# Altium PCB pcbBoard.PcbDoc
Units mil, origin at the board's own origin, x right, y up, seen from the top; angles counter-clockwise.
Board outline 6000 x 4000 mil, 2 copper layers (Top Layer, Bottom Layer); 36 components, 33 nets, 186 pads, 0 vias.
Unrouted connection lines stored in the file: 111.
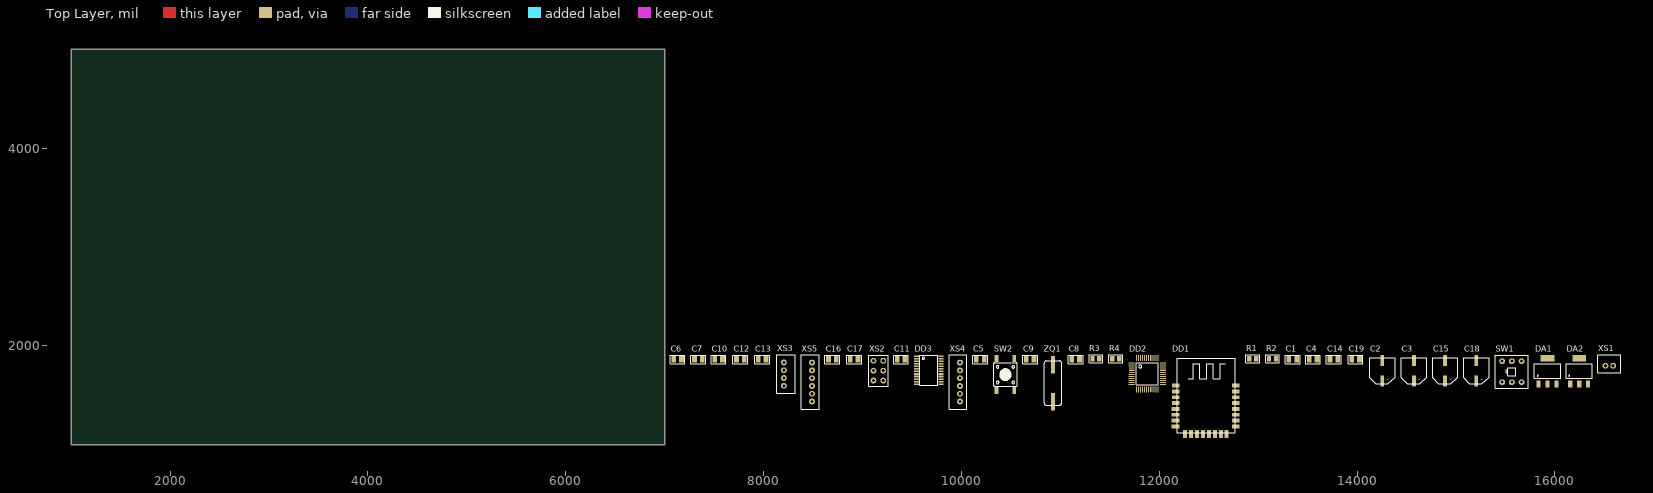
[diagram p0: Top Layer view]
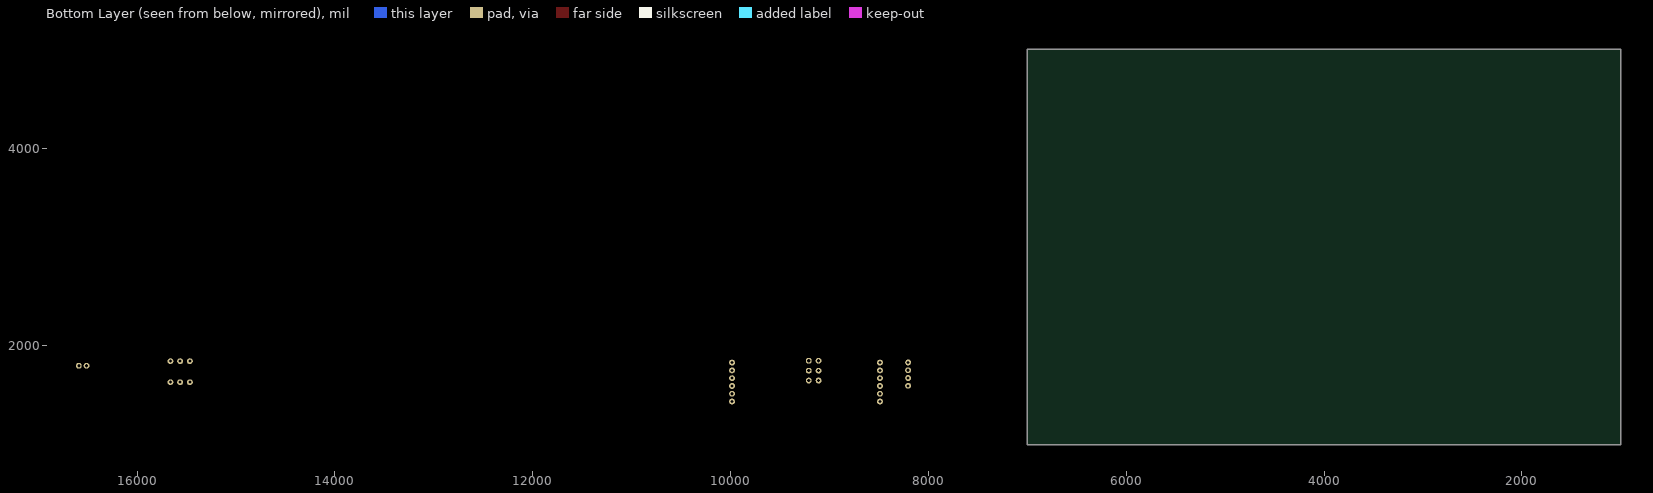
[diagram p1: Bottom Layer view, seen from below]

## Layer stack, top to bottom
Top Solder: solder mask 0.4, Solder Resist, Dk 3.5
Top Layer: signal copper 1.4
Dielectric 1: dielectric 12.6, FR-4, Dk 4.8
Bottom Layer: signal copper 1.4
Bottom Solder: solder mask 0.4, Solder Resist, Dk 3.5

## Board outline
1000,1000 7000,1000 7000,5000 1000,5000

## Design rules (kind name [scope] priority, off if disabled: settings)
Clearance [All] p1: gap=10 ignorepadtopadclearanceinfootprint=FALSE except(0: Arc-Hole Track-Hole SMDPad-Hole THPad-Hole Via-Hole Fill-Hole Poly-Hole Region-Hole Text-Hole)
PolygonConnect [All] p1: connectstyle=Relief reliefconductorwidth=10 reliefentries=4 polygonreliefangle="90 Angle" airgapwidth=10
RoomDefinition Schematic [InComponentClass('Schematic')] p1: confinementstyle=ConfineIn formatcopy=TRUE lockcomponents=FALSE outline 7045,1060 16680,1060 16680,2020 7045,2020
RoutingVias [All] p1: holewidth=28 width=50 viastyle="Through Hole" minholewidth=28 minwidth=50 maxholewidth=28 maxwidth=50
SolderMaskExpansion [All] p1: expansion=4
Width [All] p1: maxlimit=10 minlimit=10 preferedwidth=10
30 further rules are at their usual default settings.

## Components (designator, comment, footprint, x,y, rotation, side; value= is the part's Value field where it differs from the comment)
C1 "SMD0805" SMD_0805 13350,1865 r0 top value=0.1мкФ
C2 "SMD JCK ECAP" "SMD JCK" 14255,1750 r0 top value="220 мкФ"
C3 "SMD JCK ECAP" "SMD JCK" 14575,1750 r0 top value="220 мкФ"
C4 "SMD0805" SMD_0805 13555,1865 r0 top value=0.1мкФ
C5 "SMD0805" SMD_0805 10190,1865 r0 top value=0.1мкФ
C6 "SMD0805" SMD_0805 7130,1865 r0 top value=0.1мкФ
C7 "SMD0805" SMD_0805 7340,1865 r0 top value=0.1мкФ
C8 "SMD0805" SMD_0805 11155,1865 r0 top value=22пФ
C9 "SMD0805" SMD_0805 10695,1865 r0 top value=22пФ
C10 "SMD0805" SMD_0805 7545,1865 r0 top value=0.1мкФ
C11 "SMD0805" SMD_0805 9390,1865 r0 top value=0.1мкФ
C12 "SMD0805" SMD_0805 7765,1865 r0 top value=0.1мкФ
C13 "SMD0805" SMD_0805 7985,1865 r0 top value=1мкФ
C14 "SMD0805" SMD_0805 13765,1865 r0 top value=0.1мкФ
C15 "SMD JCK ECAP" "SMD JCK" 14890,1750 r0 top value="220 мкФ"
C16 "SMD0805" SMD_0805 8695,1865 r0 top value=0.1мкФ
C17 "SMD0805" SMD_0805 8915,1865 r0 top value=2.2мкФ
C18 "SMD JCK ECAP" "SMD JCK" 15205,1750 r0 top value="220 мкФ"
C19 "SMD0805" SMD_0805 13985,1865 r0 top value=0.1мкФ
DA1 "SOT223" SOT-223 15925,1745 r0 top
DA2 "SOT223" SOT-223 16245,1745 r0 top
DD1 "JDY-08" JDY-08 12470,1495 r0 top
DD2 "STM32F103C8T6" LQFP48_L 11880,1720 r0 top
DD3 "SSOP24" SSOP24 9670,1755 r0 top
R1 "4,7кОм" SMD0805 12945,1870 r0 top
R2 "1кОм" SMD0805 13145,1870 r0 top
R3 "4.7кОм" SMD0805 11360,1870 r0 top
R4 "4.7кОм" SMD0805 11560,1870 r0 top
SW1 "PS700L" KLS7-P 15565,1740 r0 top
SW2 "SWITCH" KLS76x6x4.3 10445,1710 r90 top
XS1 "" PH2.0-2P 16550,1800 r0 top
XS2 "PBD6" PBD2-3 9160,1750 r90 top
XS3 "PH2.0-4P" ph2.0-4P 8205,1715 r90 top
XS4 "1" PH2.0-6P 9985,1635 r90 top
XS5 "1" PH2.0-6P 8490,1635 r90 top
ZQ1 "HC-49SM" HC-49SM 10925,1625 r90 top

## Footprints (in the part's own frame and the unit in brackets; to place one, negate y for a bottom-side part, rotate by r counter-clockwise, add the part's x,y. Pads: shape width x height; smd on the part's side, far side on the other; paste and mask are expansions set on the pad)
HC-49SM [mm]
  rect 4.5x1.1 smd: 1(-4.75,0) 2(4.75,0)
  silkscreen extent -5.7,-2.25 5.7,2.25, body extent -6.2,-2.35 6.2,2.35, height 3.9
JDY-08 [mm]
  rect 2x1 smd: 1(-7.725,2.65) 2(-7.725,1.151) 3(-7.725,-0.351) 4(-7.725,-1.85) 5(-7.75,-3.35) 6(-7.75,-4.849) 7(-7.75,-6.351) 8(-7.75,-7.85) 17(7.7,-7.85) 18(7.7,-6.351) 19(7.7,-4.849) 20(7.7,-3.35) 21(7.725,-1.85) 22(7.725,-0.351) 23(7.725,1.151) 24(7.725,2.65)
  rect 1x2 smd: 9(-5.325,-9.75) 10(-3.75,-9.75) 11(-2.2,-9.75) 12(-0.675,-9.75) 13(0.825,-9.75) 14(2.35,-9.75) 15(3.875,-9.75) 16(5.375,-9.775)
  silkscreen extent -7.5,-9.4 7.51,9.7, body extent -7.39,-9.27 7.62,10.62, height 2.08
KLS7-P [mm]
  round 1.5 hole 0.8: 1(-2.5,2.7) 2(0,2.7) 3(2.5,2.7) 4(-2.5,-2.7) 5(0,-2.7) 6(2.5,-2.7)
  silkscreen extent -4.25,-4.25 4.25,4.25
KLS76x6x4.3 [mm]
  rect 1.8x1 smd: 1(-4.1,2.25) 1(4.1,2.25) 2(-4.1,-2.25) 2(4.1,-2.25)
  silkscreen extent -3,-3 3,3, body extent -4.5,-3 4.5,3, height 4.3
LQFP48_L [mm] "QFP, 48-Leads, Body 7x7mm, Pitch 0.5mm, IPC High Density"
  oval 1.55x0.25 smd: 1(-4.025,2.75) 2(-4.025,2.25) 3(-4.025,1.75) 4(-4.025,1.25) 5(-4.025,0.75) 6(-4.025,0.25) 7(-4.025,-0.25) 8(-4.025,-0.75) 9(-4.025,-1.25) 10(-4.025,-1.75) 11(-4.025,-2.25) 12(-4.025,-2.75) 25(4.025,-2.75) 26(4.025,-2.25) 27(4.025,-1.75) 28(4.025,-1.25) 29(4.025,-0.75) 30(4.025,-0.25) 31(4.025,0.25) 32(4.025,0.75) 33(4.025,1.25) 34(4.025,1.75) 35(4.025,2.25) 36(4.025,2.75)
  oval 0.25x1.55 smd: 13(-2.75,-4.025) 14(-2.25,-4.025) 15(-1.75,-4.025) 16(-1.25,-4.025) 17(-0.75,-4.025) 18(-0.25,-4.025) 19(0.25,-4.025) 20(0.75,-4.025) 21(1.25,-4.025) 22(1.75,-4.025) 23(2.25,-4.025) 24(2.75,-4.025) 37(2.75,4.025) 38(2.25,4.025) 39(1.75,4.025) 40(1.25,4.025) 41(0.75,4.025) 42(0.25,4.025) 43(-0.25,4.025) 44(-0.75,4.025) 45(-1.25,4.025) 46(-1.75,4.025) 47(-2.25,4.025) 48(-2.75,4.025)
  silkscreen extent -2.85,-2.85 2.85,2.85, body extent -4.49,-4.49 4.49,4.49, height 1.6
PBD2-3 [mm]
  round 1.5 hole 0.8: 1(-2.54,-1.27) 2(-2.54,1.27) 3(0,-1.27) 4(0,1.27) 5(2.54,-1.27) 6(2.54,1.27)
  silkscreen extent -4,-2.5 4,2.5, body extent -4.06,-2.54 4.06,2.54, height 8.5
PH2.0-2P [mm]
  round 1.5 hole 0.8: 1(-1,0) 2(1,0)
  silkscreen extent -2.95,-1.81 2.95,2.79, body extent -2.82,-1.74 3.08,2.76, height 6
ph2.0-4P [mm]
  round 1.5 hole 0.8: 1(-3,0) 2(-1,0) 3(1,0) 4(3,0)
  silkscreen extent -4.95,-2.92 4.95,1.78, body extent -4.95,-2.85 4.95,1.65, height 6
PH2.0-6P [mm]
  round 1.5 hole 0.8: 1(5,0) 2(3,0) 3(1,0) 4(-1,0) 5(-3,0) 6(-5,0)
  silkscreen extent -6.95,-1.81 6.95,2.79, body extent -6.95,-1.76 6.95,2.74, height 6
SMD0805 [mm]
  rect 1.1x1.4 smd: 1(0.875,0) 2(-0.875,0)
  silkscreen extent -1.78,-1.02 1.78,1.02, body extent -1,-0.6 1,0.6, height 0.7
"SMD JCK" [mm]
  rrect25% 1x2.8 smd: 1(0,-2.6) 2(0,2.6)
  silkscreen extent -3.22,-3.3 3.3,3.3, body extent -3.26,-3.93 3.34,3.66, height 5.9
SMD_0805 [mm]
  rect 1.2x1.6 smd: 1(-1,0) 2(1,0)
  silkscreen extent -1.9,-1.1 1.9,1.1, body extent -1,-0.62 1,0.63, height 1.01
SOT-223 [mm] "SOT-223/SC-73; 4 Leads; Body 6.7 x 7.3 mm, inc. leads (LxW max)"
  rect 1.1x1.75 smd: 1(-2.3,-3.3) 2(0,-3.3) 3(2.3,-3.3)
  rect 3.5x1.75 smd: 4(0,3.3)
  silkscreen extent -3.35,-1.85 3.35,1.85, body extent -3.35,-3.7 3.35,3.5, height 1.85
SSOP24 [mm] "TB6612FNG"
  rect 1.3x0.4 smd: 1(-3.1,3.575) 2(-3.1,2.925) 3(-3.1,2.275) 4(-3.1,1.625) 5(-3.1,0.975) 6(-3.1,0.325) 7(-3.1,-0.325) 8(-3.1,-0.975) 9(-3.1,-1.625) 10(-3.1,-2.275) 11(-3.1,-2.925) 12(-3.1,-3.575) 13(3.1,-3.575) 14(3.1,-2.925) 15(3.1,-2.275) 16(3.1,-1.625) 17(3.1,-0.975) 18(3.1,-0.325) 19(3.1,0.325) 20(3.1,0.975) 21(3.1,1.625) 22(3.1,2.275) 23(3.1,2.925) 24(3.1,3.575)
  silkscreen extent -2.3,-3.81 2.3,3.82, body extent -3.27,-3.95 3.28,3.95, height 1.2

## Part data
C1 C4 C5 C6 C7 C8 C9 C10 C11 C12 C13 C14 C16 C17 C19: "CAP"
DD2: I/Os (High Current)=37, Operating Frequency(F) (Processor speed) (MHz)=72, Supplier Part Number 1=497-6063-ND, Supply Voltage(Vcc) min (V)=2, A/D Converter="2x12-bit (10 Channel)", ComponentLink1Description="Manufacturer URL", ComponentLink1URL=http://www.st.com/web/en/home.html, ComponentLink2Description=Datasheet, ComponentLink2URL=http://www.st.com/st-web-ui/static/active/en/resource/technical/document/datasheet/CD00161566.pdf, ComponentLink3Description="Package Specification", ComponentLink3URL=http://www.st.com/st-web-ui/static/active/en/resource/technical/document/datasheet/DM00058181.pdf, Core="ARM Cortex-M3", DatasheetVersion="Rev. 16", FLASH Size (Prog) (kB)=64, Internal RAM Size (kB)=20, Mounting Technology="Surface Mount", PackageDescription="48-Pin Low Profile Quad Flat Package, 7 x 7 mm Body, 0.5 mm Pitch", PackageReference=LQFP48, PackageVersion="Rev. 6, 06/2013", Packing=Tray, PartNumber=STM32F103C8T6, Supplier 1=Digi-Key, Supplier 2=Farnell, Supplier 3=Newark, Supplier 4=Newark, Supplier 5=Mouser, Supplier Part Number 2=1447637, Supplier Part Number 3=59M2182, Supplier Part Number 4=57P1222, Supplier Part Number 5=511-STM32F103C8T6
R1 R2 R3 R4: library part SMD0805
SW1: library part KLS7, ComponentLink1Description=datasheet, ComponentLink1URL=https://static.chipdip.ru/lib/054/DOC000054735.pdf
XS1: library part PH2.0-2P
XS4: library part PH2.0-6P_1
XS5: library part PH2.0-6P_2
DA1 DA2: ComponentLink1Description=Datasheet, ComponentLink1URL=https://static.chipdip.ru/lib/029/DOC001029248.pdf
DD1: ComponentLink1Description=Datasheet, ComponentLink1URL=http://www.farnell.com/datasheets/2236920.pdf
SW2: ComponentLink1Description=AliExpress, ComponentLink1URL=https://ru.aliexpress.com/item/10PCS-4-4-1-6mm-4x4x1-6H-SMD-push-button-switch-microswitch-Tact-Switch/32731081870.html?spm=a2g0s.9042311.0.0.250233edGDnBBV

## Nets (pads, with @x,y where several pads share a name; then routed paths per layer and width w, separated by ;. In a path a pad name is that pad's centre, name@x,y a point inside that pad or via, vN(x,y) a via of type N, cw(c..) or ccw(c..) an arc to the next point about the centre after c; other vN are vias at no path point)
+3.3: C3.1 C4.2 C6.2 C7.2 C10.2 C11.2 C12.2 C13.2 DA1.2 DD1.1 DD2.1 DD2.9 DD2.24 DD2.36 DD2.48 DD3.19 DD3.20 R1.2 R3.2 XS2.1 XS4.5 XS5.5
+5: C18.1 C19.2 DA2.2 XS3.2
+7.2: C1.2 C2.1 C14.2 C15.1 C16.2 C17.2 DA1.3 DA2.3 DD3.13 DD3.14 DD3.24 SW1.3
GND: C1.1 C2.2 C3.2 C4.1 C5.1 C6.1 C7.1 C8.2 C9.2 C10.1 C11.1 C12.1 C13.1 C14.1 C15.2 C16.1 C17.1 C18.2 C19.1 DA1.1 DA2.1 DD1.24 DD2.8 DD2.23 DD2.35 DD2.47 DD3.3 DD3.4 DD3.9 DD3.10 DD3.18 R4.2 SW2.1 XS1.2 XS2.4 XS3.1 XS4.2 XS5.2
NetC8_1: C8.1 DD2.32 ZQ1.1
NetC9_1: C9.1 DD2.33 ZQ1.2
NetDD1_6: DD1.6 R1.1
NetDD1_23: DD1.23 R2.1
NetDD2_10: DD2.10 DD3.23
NetDD2_11: DD2.11 DD3.15
NetDD2_12: DD2.12 DD3.21
NetDD2_13: DD2.13 DD3.22
NetDD2_14: DD2.14 DD3.17
NetDD2_15: DD2.15 DD3.16
NetDD2_16: DD2.16 XS4.3
NetDD2_17: DD2.17 XS4.4
NetDD2_21: DD2.21 XS3.3
NetDD2_22: DD2.22 XS3.4
NetDD2_29: DD2.29 XS5.3
NetDD2_30: DD2.30 XS5.4
NetDD2_34: DD2.34 XS2.2
NetDD2_37: DD2.37 XS2.3
NetDD2_44: DD2.44 R4.1
NetDD3_1: DD3.1 DD3.2 XS4.1
NetDD3_5: DD3.5 DD3.6 XS4.6
NetDD3_7: DD3.7 DD3.8 XS5.6
NetDD3_11: DD3.11 DD3.12 XS5.1
NetR2_2: R2.2
NetSW1_2: SW1.2 XS1.1
NRST: C5.2 DD2.7 R3.1 SW2.2 XS2.5
PB6: DD1.20 DD2.42
PB7: DD1.19 DD2.43
PB9: DD1.22 DD2.46
pads on no net: DA1.4 DA2.4 DD1.2 DD1.3 DD1.4 DD1.5 DD1.7 DD1.8 DD1.9 DD1.10 DD1.11 DD1.12 DD1.13 DD1.14 DD1.15 DD1.16 DD1.17 DD1.18 DD1.21 DD2.2 DD2.3 DD2.4 DD2.5 DD2.6 DD2.18 DD2.19 DD2.20 DD2.25 DD2.26 DD2.27 DD2.28 DD2.31 DD2.38 DD2.39 DD2.40 DD2.41 DD2.45 SW1.1 SW1.4 SW1.5 SW1.6 XS2.6

## Text inside footprints (layer, text, board x,y; h text height)
C2: Top Overlay "+" at 14300.28,1655.51 h19.68
C3: Top Overlay "+" at 14620.28,1655.51 h19.68
C15: Top Overlay "+" at 14935.28,1655.51 h19.68
C18: Top Overlay "+" at 15250.28,1655.51 h19.68